# EAGLE board h (EAGLE 7.1.0)
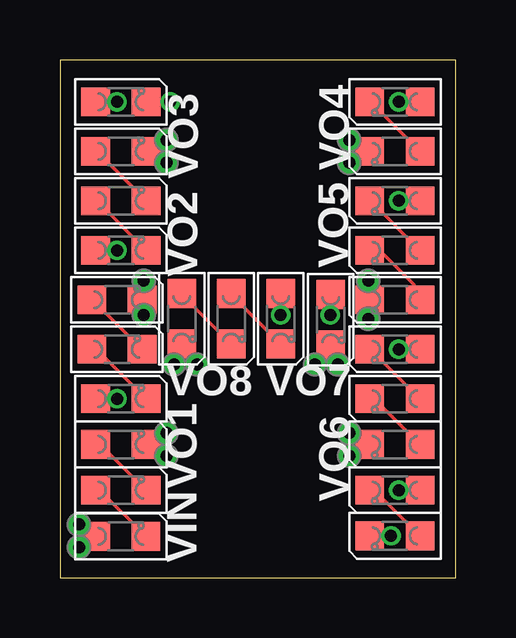
[diagram p0: board, top side]
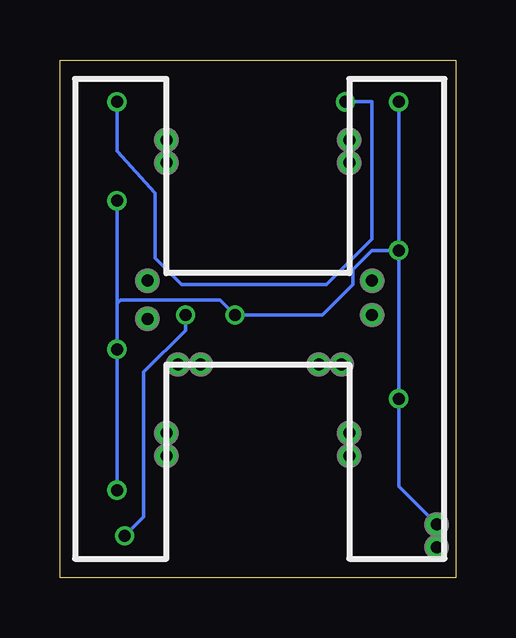
[diagram p1: board, bottom side, seen from below]

Size 16.51 x 21.59 mm. Coordinates in mm from the lower left corner, seen from the top.
Outline: 0,0 16.51,0 16.51,21.59 0,21.59 0,0
Copper layers (1*16): Top 0.035mm / dielectric 1.5mm / Bottom 0.035mm
Design rules "Fusion_eagle_rule_v1.1_tms *": minimum track width 6mil, minimum drill 12mil, track to track 6mil, track to pad 6mil, pad to pad 6mil, via to via 6mil, smd to smd 0mil, copper to edge 10mil, drill to drill 10mil, minimum pad ring 10mil, minimum via ring 6mil, stop-mask expansion 2mil, vias tented up to drill 100mil, thermal gap 10mil

## Footprints (pad centres in the part's own frame; a part is rotated, then mirrored left to right if it is on the bottom)
LED_0805 = smd 1.2 x 1.2: A 0,-1.05; C 0,1.05
P1-20 = drill 0.5: TP 0,0

## Placement (x,y rotation side)
LED1  [LED_0805]  2.53,1.72 270 top
LED2  [LED_0805]  2.54,3.65 270 top
LED3  [LED_0805]  2.54,5.56 270 top
LED4  [LED_0805]  2.54,7.46 270 top
LED5  [LED_0805]  2.38,9.53 270 top
LED6  [LED_0805]  2.38,11.59 270 top
LED7  [LED_0805]  2.54,13.65 270 top
LED8  [LED_0805]  2.54,15.72 270 top
LED9  [LED_0805]  2.54,17.78 270 top
LED10  [LED_0805]  2.54,19.84 270 top
LED11  [LED_0805]  13.97,19.84 90 top
LED12  [LED_0805]  13.97,17.78 90 top
LED13  [LED_0805]  13.97,15.72 90 top
LED14  [LED_0805]  13.97,13.65 90 top
LED15  [LED_0805]  13.97,11.59 90 top
LED16  [LED_0805]  13.97,9.53 90 top
LED17  [LED_0805]  13.97,7.46 90 top
LED18  [LED_0805]  13.97,5.56 90 top
LED19  [LED_0805]  13.97,3.65 90 top
LED20  [LED_0805]  13.97,1.75 90 top
LED21  [LED_0805]  11.29,10.76 180 top
LED22  [LED_0805]  9.21,10.79 180 top
LED23  [LED_0805]  7.14,10.79 180 top
LED24  [LED_0805]  5.08,10.79 180 top
VIN  [P1-20]  0.79,2.22 0 top
VIN1  [P1-20]  0.79,1.27 0 top
VO1  [P1-20]  4.45,6.03 0 top
VO2  [P1-20]  3.49,12.38 0 top
VO3  [P1-20]  4.45,18.26 0 top
VO4  [P1-20]  12.06,18.26 0 top
VO5  [P1-20]  12.86,12.38 0 top
VO6  [P1-20]  12.06,5.08 0 top
VO7  [P1-20]  10.64,8.89 0 top
VO8  [P1-20]  5.71,8.89 0 top
VO9  [P1-20]  4.45,5.08 0 top
VO10  [P1-20]  3.49,10.95 0 top
VO11  [P1-20]  4.45,17.3 0 top
VO12  [P1-20]  12.06,17.3 0 top
VO13  [P1-20]  12.86,10.79 0 top
VO14  [P1-20]  12.06,6.03 0 top
VO15  [P1-20]  11.59,8.89 0 top
VO16  [P1-20]  4.76,8.89 0 top

## Library data of the parts
LED1-LED24 VIN VIN1 VO1-VO16 = CyberRailGuru

## Nets
N$1: LED22.C LED23.A
N$2: LED23.C LED24.A
N$3: LED2.C LED3.A
N$4: LED1.C LED2.A
N$5: LED24.C VO8.TP VO16.TP
N$7: LED5.C LED6.A
N$8: LED4.C LED5.A
N$11: LED8.C LED9.A
N$12: LED7.C LED8.A
N$15: LED11.C LED12.A
N$16: LED10.C LED11.A
N$19: LED14.C LED15.A
N$20: LED13.C LED14.A
N$23: LED17.C LED18.A
N$24: LED16.C LED17.A
N$27: LED20.C LED21.A
N$28: LED19.C LED20.A
VIN: LED1.A LED4.A LED7.A LED10.A LED13.A LED16.A LED19.A LED22.A VIN1.TP VIN.TP
VOUT1: LED3.C VO1.TP VO9.TP
VOUT2: LED6.C VO2.TP VO10.TP
VOUT3: LED9.C VO3.TP VO11.TP
VOUT4: LED12.C VO4.TP VO12.TP
VOUT5: LED15.C VO5.TP VO13.TP
VOUT6: LED18.C VO6.TP VO14.TP
VOUT7: LED21.C VO7.TP VO15.TP

## Tracks (layer width: path | path; a pad name or v marks a point on that pad's centre or on a via)
N$1
  Top 0.152: LED23.A 7.14,11.81 LED22.C
N$2
  Top 0.152: LED24.A 5.08,11.81 LED23.C
N$3
  Top 0.152: LED3.A 1.69,5.56 LED2.C
N$4
  Top 0.152: LED2.A 1.66,3.65 LED1.C
N$5
  Top 0.152: VO16.TP 4.76,9.43 LED24.C 5.71,9.11 VO8.TP
N$7
  Top 0.152: LED6.A 1.37,11.59 LED5.C
N$8
  Top 0.152: LED5.A 1.53,9.53 LED4.C
N$11
  Top 0.152: LED9.A 1.53,17.78 LED8.C
N$12
  Top 0.152: LED8.A 1.53,15.72 LED7.C
N$15
  Top 0.152: LED11.C 12.96,19.84 LED12.A
N$16  (via drill 0.5)
  Top 0.152: LED10.C v4.6,19.84 | v14.13,19.84 LED11.A
  Bottom 0.152: v4.6,19.84 3.49,19.84 3.49,14.13 5.4,12.22 11.43,12.22 12.54,13.34 12.54,16.03 14.13,17.78 v14.13,19.84
N$19
  Top 0.152: LED14.C 13.34,13.65 14.76,12.22 14.76,11.85 LED15.A
N$20
  Top 0.152: LED13.C 12.96,15.72 LED14.A
N$23
  Top 0.152: LED17.C 13.12,7.46 LED18.A
N$24
  Top 0.152: LED16.C 12.96,9.53 LED17.A
N$27  (via drill 0.5)
  Top 0.152: LED20.C v13.81,1.75 | v11.27,10.95 11.27,11.79 LED21.A
  Bottom 0.152: v13.81,1.75 13.02,2.54 13.02,8.57 11.27,10.32 v11.27,10.95
N$28
  Top 0.152: LED19.C 13.12,3.65 LED20.A
VIN  (via drill 0.5)
  Top 0.152: VIN1.TP 1.03,1.27 LED1.A 0.99,2.22 VIN.TP | LED4.A v2.38,7.46 | LED7.A v2.38,13.65 | LED10.A v2.38,19.84 | v9.21,10.95 LED22.A | LED16.A v14.13,9.53 | LED13.A v14.13,15.72 | LED19.A v14.13,3.65
  Bottom 0.152: VIN.TP 2.38,3.81 v2.38,7.46 v2.38,13.65 | v2.38,19.84 v2.38,13.65 | v2.38,13.65 3.49,13.65 4.29,12.86 4.29,12.22 5.56,10.95 v9.21,10.95 9.84,11.59 13.97,11.59 14.13,11.43 v14.13,9.53 | v14.13,15.72 v14.13,9.53 | v14.13,3.65 v14.13,9.53
VOUT1
  Top 0.152: VO1.TP 4.07,6.03 LED3.C 4.07,5.08 VO9.TP
VOUT2
  Top 0.152: VO2.TP 3.49,11.65 LED6.C 3.49,11.53 VO10.TP
VOUT3
  Top 0.152: VO3.TP 4.07,18.26 LED9.C 4.07,17.3 VO11.TP
VOUT4
  Top 0.152: VO4.TP 12.44,18.26 LED12.C 12.44,17.3 VO12.TP
VOUT5
  Top 0.152: VO13.TP 12.86,11.53 LED15.C 12.86,11.65 VO5.TP
VOUT6
  Top 0.152: VO6.TP 12.44,5.08 LED18.C 13.18,5.81 13.18,6.03 VO14.TP
VOUT7
  Top 0.152: VO15.TP 11.59,9.41 LED21.C 10.64,9.05 VO7.TP

## Text on the board
201bmp: H